# Altium PCB nRF54L15_qfaa_4L_config1.PcbDoc
Units mm, origin at the board's own origin, x right, y up, seen from the top; angles counter-clockwise.
Board outline 15 x 13 mm, 4 copper layers (Top Layer, Mid-Layer 1, Mid-Layer 2, Bottom Layer), stack 1.54 mm thick; 22 components, 46 nets, 93 pads, 72 vias.
Unrouted connection lines stored in the file: 1.
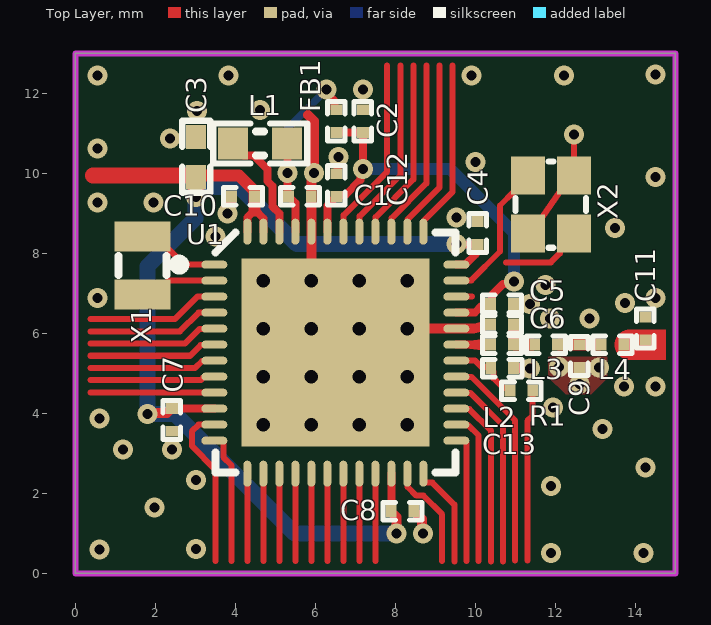
[diagram p0: Top Layer view]
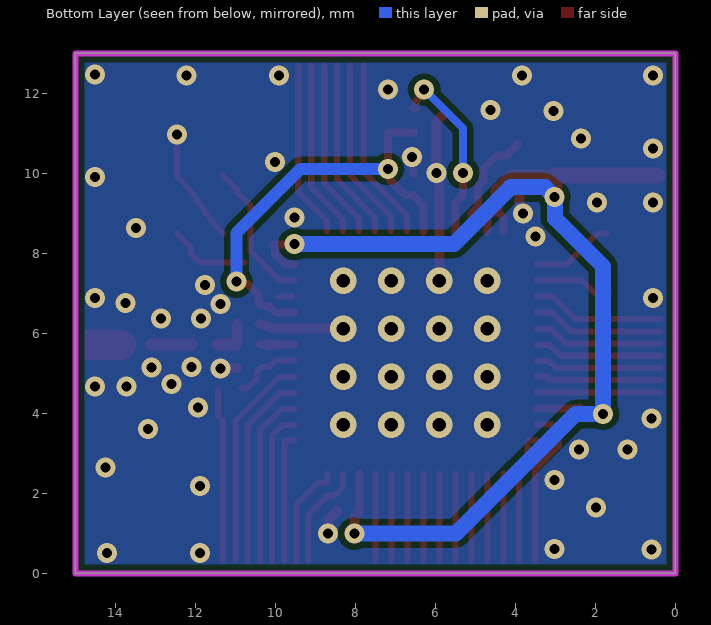
[diagram p1: Bottom Layer view, seen from below]
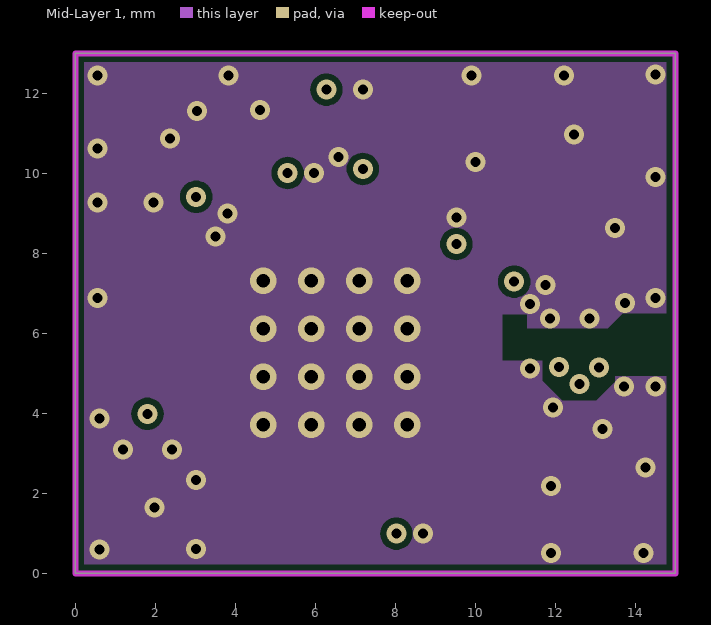
[diagram p2: Mid-Layer 1]
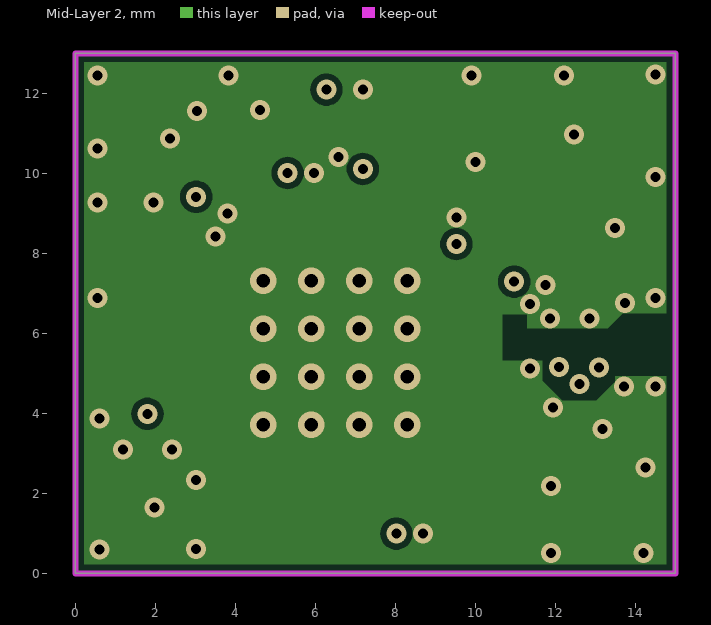
[diagram p3: Mid-Layer 2]
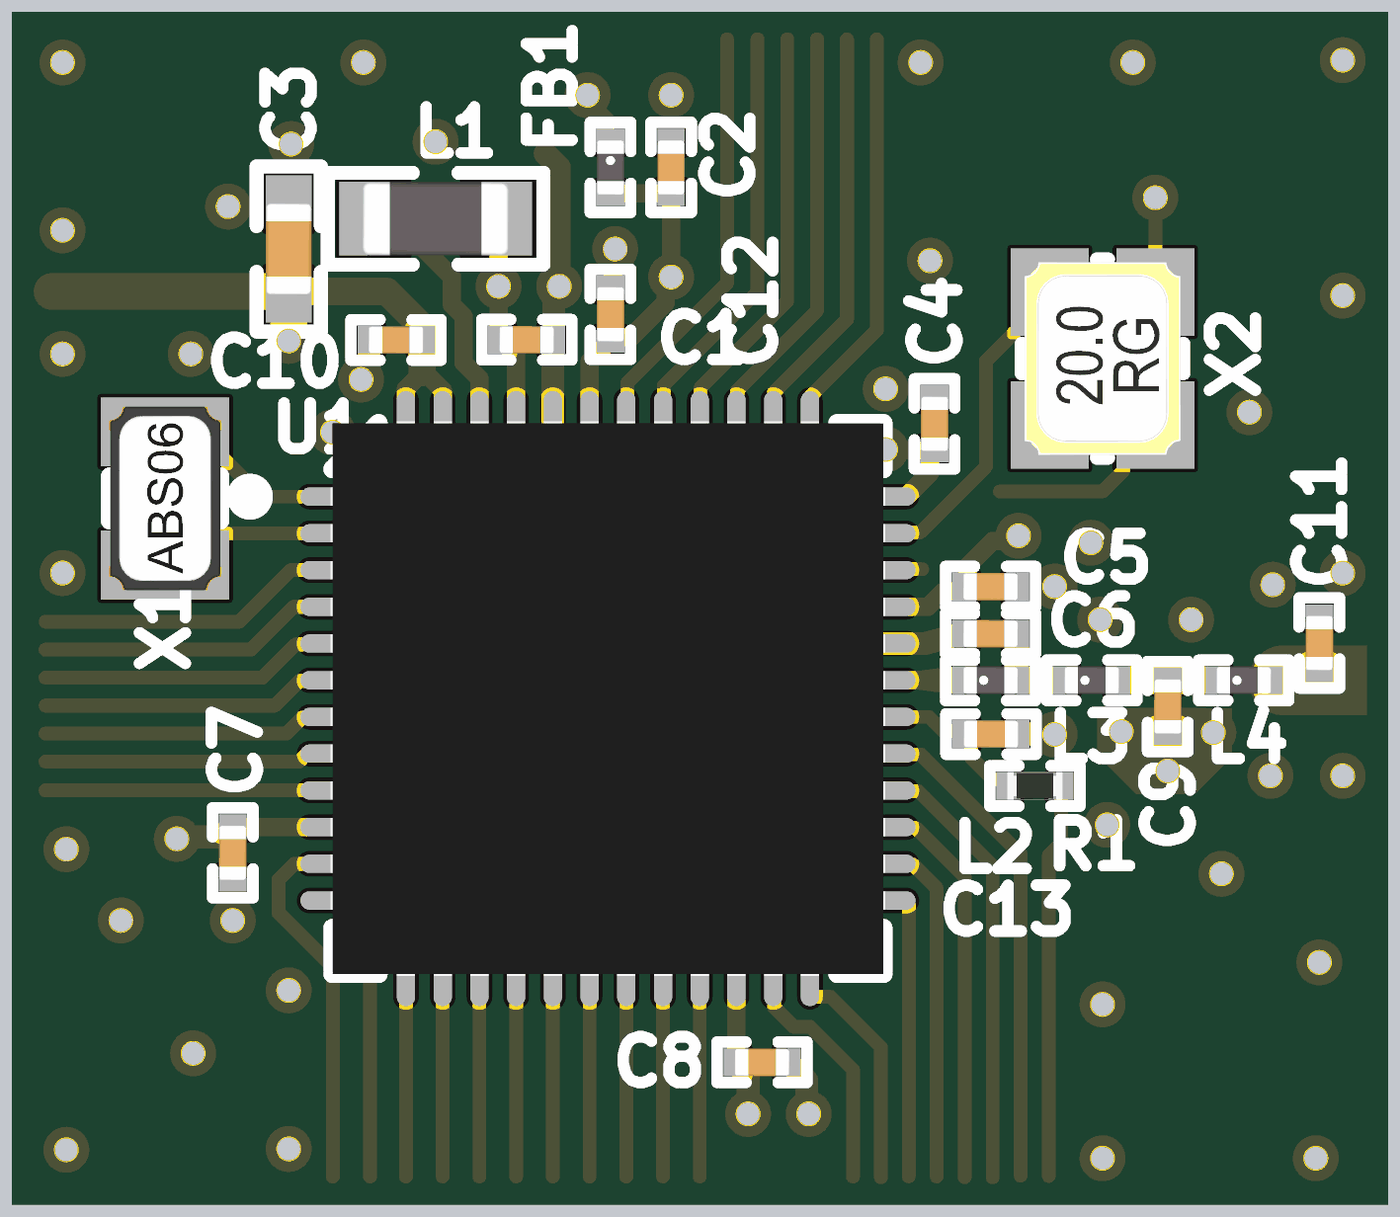
[diagram p4: 3D render of the assembled board from above, using the file's embedded part models]

## Layer stack, top to bottom
Top Solder: solder mask 0.0102, Solder Resist, Dk 3.5
Top Layer: signal copper 0.035
Dielectric 1: prepreg 0.1, PP-018, Dk 4.3
Mid-Layer 1: signal copper 0.035
Dielectric 2: core 1.2, Core-042, Dk 4.6
Mid-Layer 2: signal copper 0.035
Dielectric 3: prepreg 0.1, PP-018, Dk 4.3
Bottom Layer: signal copper 0.035
Bottom Solder: solder mask 0.0102, Solder Resist, Dk 3.5

## Board outline
0,0 0,13 15,13 15,0

## Design rules (kind name [scope] priority, off if disabled: settings)
Clearance Polygon_ANT [(InNamedPolygon('Top_Layer-GND')) or IsFill or IsRegion vs InNet('RF')] p1: gap=0.127 ignorepadtopadclearanceinfootprint=FALSE
Clearance Polygon [(InNamedPolygon('Top_Layer-GND'))  or (InNamedPolygon('Bottom_Layer-GND'))] p2: gap=0.15 ignorepadtopadclearanceinfootprint=FALSE
Clearance [All] p3: gap=0.15 ignorepadtopadclearanceinfootprint=FALSE
ComponentClearance [All] p1 off: gap=0.254 collisioncheckmode=3 verticalgap=0.254 showdistances=FALSE
FabricationTestPointUsage TestPointUsage [All] p1: valid=0 allowmultiple=FALSE
FabricationTestpoint Testpoint [All] p1: side=3 testpointundercomponent=TRUE minsize=1.016 maxsize=2.54 preferedsize=1.524 minholesize=0 maxholesize=1.016 preferedholesize=0.813 testpointgrid=0.025 allowsidetop=TRUE allowsidebottom=TRUE usegrid=TRUE gridtolerance=0
Height [All] p1 off: minheight=0 maxheight=25.4 prefheight=12.7
HoleSize [All] p1: absolutevalues=TRUE maxlimit=4.064 minlimit=0.2 maxpercent=80.000 minpercent=20.000
HoleToHoleClearance [All] p1: gap=0.36 allowstackedmicrovias=TRUE
MinimumAnnularRing [All] p1 off: minimumring=0.152
MinimumSolderMaskSliver [All] p1: minsoldermaskwidth=0.11
PlaneClearance [All] p1: clearance=0.2
PolygonConnect PolygonConnect_SMD_PADs [InComponent('C1','C2','C4','C5','C7','C8','C9','C10','C11') vs InNet('GND')] p1: connectstyle=Direct reliefconductorwidth=0.254 reliefentries=4 polygonreliefangle="90 Angle" airgapwidth=0.254
PolygonConnect PolygonConnect_GND_VIAs [isVia and innet(gnd)] p2: connectstyle=Direct reliefconductorwidth=0.254 reliefentries=4 polygonreliefangle="90 Angle" airgapwidth=0.254
PolygonConnect [All] p3: thpad.connectstyle=Relief thpad.reliefconductorwidth=0.25 thpad.reliefentries=4 thpad.polygonreliefangle="90 Angle" thpad.airgapwidth=0.2 smdpad.connectstyle=Relief smdpad.reliefconductorwidth=0.25 smdpad.reliefentries=4 smdpad.polygonreliefangle="90 Angle" smdpad.airgapwidth=0.2 via.connectstyle=Direct via.reliefconductorwidth=0.254 via.reliefentries=4 via.polygonreliefangle="90 Angle" via.airgapwidth=0.254
RoutingVias [All] p1: holewidth=0.406 width=0.813 viastyle="Through Hole" minholewidth=0.2 minwidth=0.4 maxholewidth=0.711 maxwidth=1.27
SilkToSolderMaskClearance SilkscreenOverComponentPads [IsPad] p1: minsilkscreentomaskgap=0.254 clearancetoexposedcopper=TRUE
SolderMaskExpansion SolderMaskExpansion_via [IsVia] p1: expansion=0.102 istentingtop=TRUE
SolderMaskExpansion [All] p2: expansion=0.04 istentingtop=FALSE
SupplyNets "Schematic Supply Nets_2" [InNet('GND')] p1: voltage=0.000
SupplyNets "Schematic Supply Nets" [InNet('VDD_nRF')] p2: voltage=0.000
Width [All] p1: maxlimit=2.54 minlimit=0.15 preferedwidth=0.15
21 further rules are at their usual default settings.

## Components (designator, comment, footprint, x,y, rotation, side; value= is the part's Value field where it differs from the comment)
C1 "2.2µF" CAPC0603X03L_C 5.615,9.425 r180 top
C2 "2.2µF" CAPC0603X03L_C 7.188,11.303 r270 top
C3 "10µF" CAPC1005X04L 3.023,10.414 r270 top
C4 "100nF" CAPC0603X03L_C 10.058,8.509 r90 top
C5 "2.2nF" CAPC0603X03L_C 10.668,6.735 r180 top
C6 "1.5pF" CAPC0603X03L_C 10.668,6.223 r0 top
C7 "100nF" CAPC0603X03L_C 2.413,3.835 r270 top
C8 "100nF" CAPC0603X03L_C 8.179,1.554 r0 top
C9 "2.0pF" CAPC0603X03L_C 12.598,5.43 r90 top
C10 "100nF" CAPC0603X03L_C 4.191,9.423 r180 top
C11 "0.3pF" CAPC0603X03L_C 14.249,6.121 r270 top
C12 "10nF" CAPC0603X03L_C 6.528,9.703 r270 top
C13 "3.9pF" CAPC0603X03L_C 10.673,5.13 r180 top
FB1 "120R/0.2A" INDC0603X03L_C 6.528,11.303 r270 top
L1 "4.7µH" INDC1608X06L 4.623,10.744 r0 top
L2 "2.7nH" INDC0603X03L_C 10.668,5.715 r0 top
L3 "3.5nH" INDC0603X03L_C 11.77,5.715 r0 top
L4 "3.5nH" INDC0603X03L_C 13.426,5.715 r0 top
R1 "1k" RESC0603X03L_C 11.151,4.564 r0 top
U1 "nRF54L15-QFAA" QFN40P600X600X90-48N 6.5,5.516 r0 top locked
X1 "32.768kHz" XTAL_2012 1.676,7.696 r90 top
X2 "32MHz" BT-XTAL_2016 11.887,9.22 r90 top

## Footprints (in the part's own frame and the unit in brackets; to place one, negate y for a bottom-side part, rotate by r counter-clockwise, add the part's x,y. Pads: shape width x height; smd on the part's side, far side on the other; paste and mask are expansions set on the pad)
BT-XTAL_2016 [mm] "Crystal 2.0 x 1.6 mm"
  rect 0.95x0.85 smd: 1(-0.725,-0.575) 2(0.725,-0.575) 3(0.725,0.575) 4(-0.725,0.575)
  silkscreen extent -1.08,-0.88 1.08,0.88, body extent -1.05,-0.85 1.05,0.85, height 0.56
CAPC0603X03L_C [mm] "Chip Capacitor, 2-Leads, Body 0.6x0.3mm, IPC High Density"
  rect 0.27x0.3 smd mask+0.05: 1(-0.285,0) 2(0.285,0)
  silkscreen extent -0.49,-0.22 0.49,0.22, body extent -0.3,-0.15 0.3,0.15, height 0.3
CAPC1005X04L [mm] "Chip Capacitor, 2-Leads, Body 1.0x0.5mm, IPC High Density"
  rect 0.6x0.5 smd: 1(-0.5,0) 2(0.5,0)
  silkscreen extent -0.9,-0.35 0.9,0.35, body extent -0.5,-0.25 0.5,0.25, height 0.5
INDC0603X03L_C [mm] "Chip Inductor, 2-Leads, Body 0.6x0.3mm, IPC High Density"
  rect 0.27x0.3 smd: 1(-0.285,0) 2(0.285,0)
  silkscreen extent -0.49,-0.22 0.49,0.22, body extent -0.3,-0.15 0.3,0.15, height 0.3
INDC1608X06L [mm] "Chip Inductor, 2-Leads, Body 1.6x0.8mm, IPC High Density"
  rect 0.75x0.8 smd: 1(-0.675,0) 2(0.675,0)
  silkscreen extent -1.17,-0.5 1.17,0.5, body extent -0.8,-0.4 0.8,0.4, height 0.8
QFN40P600X600X90-48N [mm] "QFN, 48-Leads, Body 6,0x6,0mm (max), Pitch 0,40mm, IPC Medium Density"
  oval 0.65x0.2 smd: 1(-3.025,2.2) 2(-3.025,1.8) 3(-3.025,1.4) 4(-3.025,1) 5(-3.025,0.6) 6(-3.025,0.2) 7(-3.025,-0.2) 8(-3.025,-0.6) 9(-3.025,-1) 10(-3.025,-1.4) 11(-3.025,-1.8) 12(-3.025,-2.2) 25(3.025,-2.2) 26(3.025,-1.8) 27(3.025,-1.4) 28(3.025,-1) 29(3.025,-0.6) 30(3.025,-0.2) 31(3.025,0.2) 32(3.025,0.6) 33(3.025,1) 34(3.025,1.4) 35(3.025,1.8) 36(3.025,2.2)
  oval 0.2x0.65 smd: 13(-2.2,-3.025) 14(-1.8,-3.025) 15(-1.4,-3.025) 16(-1,-3.025) 17(-0.6,-3.025) 18(-0.2,-3.025) 19(0.2,-3.025) 20(0.6,-3.025) 21(1,-3.025) 22(1.4,-3.025) 23(1.8,-3.025) 24(2.2,-3.025) 37(2.2,3.025) 38(1.8,3.025) 39(1.4,3.025) 40(1,3.025) 41(0.6,3.025) 42(0.2,3.025) 43(-0.2,3.025) 44(-0.6,3.025) 45(-1,3.025) 46(-1.4,3.025) 47(-1.8,3.025) 48(-2.2,3.025)
  rect 4.7x4.7 smd: 49(0,0)
  silkscreen extent -4.02,-3 3,3, body extent -3.02,-3.02 3.02,3.02, height 0.86
RESC0603X03L_C [mm] "Chip Resistor, 2-Leads, Body 0.6x0.3mm, IPC High Density"
  rect 0.27x0.3 smd: 1(-0.285,0) 2(0.285,0)
  silkscreen extent -0.49,-0.22 0.49,0.22, body extent -0.3,-0.15 0.3,0.15, height 0.23
XTAL_2012 [mm] "XTAL SMD 2.0 x 1.2 mm"
  rect 0.75x1.4 smd: 1(-0.725,0) 2(0.725,0)
  silkscreen extent -0.24,-0.6 0.24,0.6, body extent -1,-0.61 1,0.61, height 0.6

## Part data
C1 C2: library part C0201-2µ2-2.5V-X6T-GRM033D80E225ME47D, "Capacitor, Ceramic, 2.2µF 2.5V X6T 0201,±20%", Manufacturer=Murata, Manufacturer Part Number=GRM033R61A225KE47, Part number IPS=N.A., Part number NEMS=100200527, Supplier Part Number 1=81-GRM033D80E225ME7D, Artikkelnr Noca=N.A., Author=stl1, Component Class=Capacitors, Component Status=Active, ComponentLink1Description=Datasheet, ComponentLink1URL=https://www.murata.com/products/productdetail?partno=GRM033D80E225ME47%23, ComponentLink2Description="Supplier link", ComponentLink2URL=N.A., Footprint Doc=0201, HelpURL=N.A., LatestRevisionDate=2022-02-27, Note="2.5V, 20%, X6T", Pad Count=2, Part Number=C0201-2µ2-2.5V-X6T-GRM033D80E225ME47D, Part number Norautron=N.A., PartId=100200527, Published=2022-02-27, Supplier 1=Mouser, Supplier 2=Digi-Key, Supplier Part Number 2=490-18653-1-ND
C3: library part C0402-10µF-6.3V-X6S, "Capacitor, X6S, ±20%, 6.3V", Manufacturer=N.A., Part number NEMS=100200478, Artikkelnr Noca=N.A., Author=getr, Component Class=Capacitors, Component Status=Active, ComponentLink1Description=Datasheet, ComponentLink1URL=N.A., ComponentLink2Description="Supplier link", ComponentLink2URL=N.A., Footprint Doc=0402, HelpURL=N.A., LatestRevisionDate=2021-06-25, Manufacturer Part Number=N.A., Note=6.3V, Pad Count=2, Part Number=C0402-10µF-6.3V-X6S, Part number IPS=N.A., Part number Norautron=N.A., PartId=100200478, Published=2021-06-25, Supplier 1=N.A., Supplier 2=N.A., Supplier Part Number 1=N.A., Supplier Part Number 2=N.A.
C4 C7 C8 C10: library part C0201-100n-10V-X7R, "Capacitor, X7R, ±10%", Manufacturer=N.A., Part number NEMS=100200469, Artikkelnr Noca=N.A., Author=getr, Component Class=Capacitors, Component Status=Active, ComponentLink1Description=Datasheet, ComponentLink1URL=N.A., ComponentLink2Description="Supplier link", ComponentLink2URL=N.A., Footprint Doc=0201, HelpURL=N.A., LatestRevisionDate=2021-04-12, Manufacturer Part Number=N.A., Note=10V, Pad Count=2, Part Number=C0201-100n-10V-X7R, Part number IPS=N.A., Part number Norautron=N.A., PartId=100200469, Published=2021-04-12, Supplier 1=N.A., Supplier 2=N.A., Supplier Part Number 1=N.A., Supplier Part Number 2=N.A.
C5: library part C0201-2n2, "Capacitor, X7R, ±10%, 10V", Manufacturer=N.A., Part number IPS=00000001778, Part number NEMS=100200060, Part number Norautron=26470002, Artikkelnr Noca=N.A., Author=rsk, Component Class=Capacitors, Component Status=Active, ComponentLink1Description=Datasheet, ComponentLink1URL=N.A., ComponentLink2Description="Supplier link", ComponentLink2URL=N.A., Footprint Doc=0201, HelpURL=N.A., LatestRevisionDate=2014-11-13, Manufacturer Part Number=N.A., Note=10V, Pad Count=2, Part Number=C0201-2n2, PartId=100200060, Published=2014-11-13, Supplier 1=N.A., Supplier 2=N.A., Supplier Part Number 1=N.A., Supplier Part Number 2=N.A.
C6: library part C0201-1.5p-25V-NP0-GJM0335C1E1R5WB01, "Capacitor, NP0, ±0.05pF, 25V, High Q", Manufacturer=Murata, Manufacturer Part Number=GJM0335C1E1R5WB01, Part number IPS=N.A., Part number NEMS=100200477, Supplier Part Number 1=490-11176-2-ND, Artikkelnr Noca=N.A., Author=masi, Component Class=Capacitors, Component Status=Active, ComponentLink1Description=Datasheet, ComponentLink1URL=https://search.murata.co.jp/Ceramy/image/img/A01X/G101/ENG/GJM0335C1E1R5WB01-01.pdf, ComponentLink2Description="Supplier link", ComponentLink2URL=N.A., Footprint Doc=0201, HelpURL=https://www.murata.com/products/productdetail?partno=GJM0335C1E1R5WB01%23, LatestRevisionDate=2021-06-15, Note=25V, Pad Count=2, Part Number=C0201-1.5p-25V-NP0-GJM0335C1E1R5WB01, Part number Norautron=N.A., PartId=100200477, Published=2021-06-15, Supplier 1=Digi-Key, Supplier 2=Mouser, Supplier Part Number 2=81-GJM0335C1E1R5WB1D
C9: library part C0201-2.0p-HQ-Murata, "Capacitor, NP0, ±0.05pF, 25V", Manufacturer=Murata, Manufacturer Part Number=GJM0335C1E2R0WB01, Part number IPS=00000001775, Part number NEMS=100200419, Part number Norautron=N.A., Artikkelnr Noca=N.A., Author=rsk, Component Class=Capacitors, Component Status=Active, ComponentLink1Description=Datasheet, ComponentLink1URL=N.A., ComponentLink2Description="Supplier link", ComponentLink2URL=N.A., Footprint Doc=0201, HelpURL=https://psearch.en.murata.com/capacitor/product/GJM0335C1E2R0WB01%23.html, LatestRevisionDate=2018-10-25, Note=25V, Pad Count=2, Part Number=C0201-2.0p-HQ-Murata, PartId=100200419, Published=2018-10-25, Supplier 1=N.A., Supplier 2=N.A., Supplier Part Number 1=N.A., Supplier Part Number 2=N.A.
C11: library part C0201-0.3p-50V-GRM0335C1HR30BA01, "Capacitor, C0G, ±0.1pF, 50V", Manufacturer=Murata, Manufacturer Part Number=GRM0335C1HR30BA01, Part number IPS=N.A., Part number NEMS=100200650, Supplier Part Number 1=490-6135-2-ND, Artikkelnr Noca=N.A., Author=masi, Component Class=Capacitors, Component Status=Active, ComponentLink1Description=Datasheet, ComponentLink1URL=https://www.murata.com/en-global/products/productdetail?partno=GRM0335C1HR30BA01%23, ComponentLink2Description="Supplier link", ComponentLink2URL=N.A., Footprint Doc=0201, HelpURL=N.A., LatestRevisionDate=2024-01-10, Note=50V, Pad Count=2, Part Number=C0201-0.3p-50V-GRM0335C1HR30BA01, Part number Norautron=N.A., PartId=100200650, Published=2024-01-10, Supplier 1=Digi-Key, Supplier 2=Mouser, Supplier Part Number 2=81-GRM0335C1HR30BA1D
C12: library part C0201-10n-6.3V-X7R, "Capacitor, X7R, 6.3V", Manufacturer=Murata, Manufacturer Part Number=GRM033R70J103KA01D, Part number IPS=N.A., Part number NEMS=100200407, Supplier Part Number 1=490-1262-1-ND, Artikkelnr Noca=N.A., Author=rsk, Component Class=Capacitors, Component Status=Active, ComponentLink1Description=Datasheet, ComponentLink1URL=http://search.murata.co.jp/Ceramy/image/img/A01X/G101/ENG/GRM033R70J103KA01-01.pdf, ComponentLink2Description="Supplier link", ComponentLink2URL=N.A., Footprint Doc=0201, HelpURL=N.A., LatestRevisionDate=2020-10-13, Note=6.3V, Pad Count=2, Part Number=C0201-10n-6.3V-X7R, Part number Norautron=N.A., PartId=100200407, Published=2018-05-07, Supplier 1=Digi-Key, Supplier 2=N.A., Supplier Part Number 2=N.A.
C13: library part C0201-3.9p, "Chip Cap 0201", Manufacturer=N.A., Part number NEMS=100200024, Artikkelnr Noca=N.A., Author=rsk, Component Class=Capacitors, Component Status=Active, ComponentLink1Description=Datasheet, ComponentLink1URL=N.A., ComponentLink2Description="Supplier link", ComponentLink2URL=N.A., Footprint Doc=0201, HelpURL=N.A., LatestRevisionDate=2014-11-13, Manufacturer Part Number=N.A., Note="Chip Cap 1%", Pad Count=2, Part Number=C0201-3.9p, Part number IPS=N.A., Part number Norautron=N.A., PartId=100200024, Published=2014-11-13, Supplier 1=N.A., Supplier 2=N.A., Supplier Part Number 1=N.A., Supplier Part Number 2=N.A.
FB1: library part FB0201-120R@100M-200mA-BLM03AG121SN1D, "Ferrite Bead, 120 Ohm @ 100MHz, 200mA, 500 mOhm Max", Manufacturer=Murata, Manufacturer Part Number=BLM03AG121SN1D, Part number IPS=N.A., Part number NEMS=100300419, Supplier Part Number 1=490-5622-1-ND, Artikkelnr Noca=N.A., Author=stl1, Component Class=Inductors, Component Status=Active, ComponentLink1Description=Datasheet, ComponentLink1URL=https://www.murata.com/en-eu/products/productdetail?partno=BLM03AG121SN1%23, ComponentLink2Description="Supplier link", ComponentLink2URL=N.A., Footprint Doc=0201, HelpURL=N.A., LatestRevisionDate=2022-02-27, Note="Ferrite Bead", Pad Count=2, Part Number=FB0201-120R@100M-200mA-BLM03AG121SN1D, Part number Norautron=N.A., PartId=100300419, Published=2022-02-27, Supplier 1=Digi-Key, Supplier 2=Mouser, Supplier Part Number 2=81-BLM03AX121SN1D
L1: library part L0603-4µ7-MLZ1608M4R7WT000, "Inductor, 120mA, ±20%, 0.65R", Manufacturer="TDK Corporation", Manufacturer Part Number=MLZ1608M4R7WT000, Part number IPS=N.A., Part number NEMS=100300440, Supplier Part Number 1=445-6390-2-ND, Artikkelnr Noca=N.A., Author=stl1, Component Class=Inductors, Component Status=Active, ComponentLink1Description=Datasheet, ComponentLink1URL=https://product.tdk.com/en/search/inductor/inductor/smd/info?part_no=MLZ1608M4R7WT000, ComponentLink2Description="Supplier link", ComponentLink2URL=N.A., Footprint Doc=0603, HelpURL=N.A., LatestRevisionDate=2023-05-10, Note="Power Inductor ±20%", Pad Count=2, Part Number=L0603-4µ7-MLZ1608M4R7WT000, Part number Norautron=N.A., PartId=100300440, Published=2023-05-10, Supplier 1=Digi-Key, Supplier 2=Mouser, Supplier Part Number 2=810-MLZ1608M4R7WT000
L2: library part L0201-2n7-HQ-Murata, "Inductor, 600mA, ±0.1ｎH, 120mOhm", Manufacturer=Murata, Manufacturer Part Number=LQP03HQ2N7B02, Part number IPS=00000001753, Part number NEMS=100300214, Part number Norautron=N.A., Supplier Part Number 1=490-13909-1-ND, Artikkelnr Noca=N.A., Author=rsk, Component Class=Inductors, Component Status=Active, ComponentLink1Description=Datasheet, ComponentLink1URL=https://search.murata.co.jp/Ceramy/image/img/P02/JELF243C-0021.pdf, ComponentLink2Description="Supplier link", ComponentLink2URL=N.A., Footprint Doc=0201, HelpURL=https://psearch.en.murata.com/inductor/product/LQP03HQ2N7B02%23.html, LatestRevisionDate=2018-10-23, Note="-55°C ~ 125°C", Pad Count=2, Part Number=L0201-2n7-HQ-Murata, PartId=100300214, Published=2018-10-23, Supplier 1=Digi-Key, Supplier 2=N.A., Supplier Part Number 2=N.A.
L3 L4: library part L0201-3n5-HQ-Murata, "Inductor, 500mA, ±0.1ｎH, 170mOhm", Manufacturer=Murata, Manufacturer Part Number=LQP03HQ3N5B02, Part number IPS=N.A., Part number NEMS=100300222, Supplier Part Number 1=490-13925-1-ND, Artikkelnr Noca=N.A., Author=rsk, Component Class=Inductors, Component Status=Active, ComponentLink1Description=Datasheet, ComponentLink1URL=https://search.murata.co.jp/Ceramy/image/img/P02/JELF243C-0021.pdf, ComponentLink2Description="Supplier link", ComponentLink2URL=N.A., Footprint Doc=0201, HelpURL=https://psearch.en.murata.com/inductor/product/LQP03HQ3N5B02%23.html, LatestRevisionDate=2018-10-23, Note="-55°C ~ 125°C", Pad Count=2, Part Number=L0201-3n5-HQ-Murata, Part number Norautron=N.A., PartId=100300222, Published=2018-10-23, Supplier 1=Digi-Key, Supplier 2=N.A., Supplier Part Number 2=N.A.
R1: library part R0201-1k0, "Resistor, ±1%, 0.05W", Manufacturer=N.A., Part number IPS=00000005786, Part number NEMS=100100043, Artikkelnr Noca=N.A., Author=rsk, Component Class=Resistors, Component Status=Active, ComponentLink1Description=Datasheet, ComponentLink1URL=N.A., ComponentLink2Description="Supplier link", ComponentLink2URL=N.A., Footprint Doc=0201, HelpURL=N.A., LatestRevisionDate=2014-11-13, Manufacturer Part Number=N.A., Note="Chip Res 1%", Pad Count=2, Part Number=R0201-1k0, Part number Norautron=N.A., PartId=100100043, Published=2014-11-13, Supplier 1=N.A., Supplier 2=N.A., Supplier Part Number 1=N.A., Supplier Part Number 2=N.A.
U1: "Multi-protocol Bluetooth Low Energy, IEEE 802.15.4 and 2.4GHz proprietary Wireless MCU", Manufacturer="Nordic Semiconductor", Part number IPS=N.A., Part number NEMS=102000370, Artikkelnr Noca=N.A., Author=stl1, Component Class=Nordic_Devices, Component Status=Active, ComponentLink1Description=Datasheet, ComponentLink1URL=N.A., ComponentLink2Description="Supplier link", ComponentLink2URL=N.A., Footprint Doc=QFN-48, HelpURL=N.A., LatestRevisionDate=2024-11-27, Manufacturer Part Number=nRF54L15-QFAA, Note=N.A., Pad Count=49, Part Number=nRF54L15-QFAA, Part number Norautron=N.A., PartId=102000370, Published=2024-11-27, Supplier 1="Nordic Semiconductor", Supplier 2=N.A., Supplier Part Number 1=nRF54L15-QFAA, Supplier Part Number 2=N.A.
X1: library part XTAL_SMD2012_32.768kHz_9pF_TXC, "XTAL SMD 2012, 32.768kHz, 9pF, ±20ppm", Manufacturer="TXC Corporation", Manufacturer Part Number=9HT11-32.768KDZC-T, Part number IPS=N.A., Part number NEMS=101600107, Supplier Part Number 1=887-1426-2-ND, Artikkelnr Noca=N.A., Author=eisk, Component Class=Oscillators, Component Status=Active, ComponentLink1Description=Datasheet, ComponentLink1URL=http://www.txccrystal.com/images/pdf/9ht11.pdf, ComponentLink2Description="Supplier link", ComponentLink2URL=https://www.digikey.com/en/products/detail/9HT11-32.768KDZC-T/887-1426-1-ND/2403277, Footprint Doc=XTAL_2012, HelpURL=http://www.txccrystal.com/images/pdf/9ht11.pdf, LatestRevisionDate=2023-03-14, Note="XTAL SMD 32.768kHz", Pad Count=2, Part Number=XTAL_SMD2012_32.768kHz_9pF_TXC, Part number Norautron=N.A., PartId=101600107, Published=2014-03-28, Supplier 1=Digi-Key, Supplier 2=Mouser, Supplier Part Number 2=717-9HT11-32.7KDZC-T
X2: library part XTAL_SMD2016_32MHz_8pF_Kyocera, "XTAL SMD 2016, 32MHz, Cl=8pF, Tot: ±40ppm", Manufacturer=Kyocera, Manufacturer Part Number=CX2016DB32000D0WZRC1, Part number IPS=00000007827, Part number NEMS=101600039, Part number Norautron=26511136, Supplier Part Number 1=1253-1586-1-ND, Artikkelnr Noca=22010022, Author=rsk, Component Class=Oscillators, Component Status=Active, ComponentLink1Description=Datasheet, ComponentLink1URL=N.A., ComponentLink2Description="Supplier link", ComponentLink2URL=N.A., Footprint Doc=XTAL_2016, HelpURL=http://media.digikey.com/pdf/Data%20Sheets/AVX%20PDFs/CX2016DB32000D0WZRC1_Spec.pdf, LatestRevisionDate=2016-06-02, Note="XTAL SMD 32.000MHz", Pad Count=4, Part Number=XTAL_SMD2016_32MHz_8pF_Kyocera, PartId=101600039, Published=2015-10-15, Supplier 1=Digi-Key, Supplier 2=N.A., Supplier Part Number 2=N.A.

## Via types
v1: diameter 0.5, hole 0.25, Top Layer to Bottom Layer, tented both sides, 56 vias
v2: diameter 0.66, hole 0.33, Top Layer to Bottom Layer, tented both sides, 16 vias

## Nets (pads, with @x,y where several pads share a name; then routed paths per layer and width w, separated by ;. In a path a pad name is that pad's centre, name@x,y a point inside that pad or via, vN(x,y) a via of type N, cw(c..) or ccw(c..) an arc to the next point about the centre after c; other vN are vias at no path point)
DCC: L1.1 U1.46 | length 2.8
  Top Layer w0.2: L1.1 3.948,10.719 4.223,10.444 4.466,10.444 4.801,10.109 4.801,9.804 4.928,9.677 4.928,9.172 5.1,9 U1.46
DECA: C2.2 C5.2 C12.2 FB1.2 U1.33 U1.43 | length 11.2
  Top Layer w0.2: U1.43 6.3,9.19 C12.2 6.563,9.453 6.75,9.453 7.131,9.833 7.131,10.052 v1(7.188,10.109) C2.2 ; FB1.2 C2.2@7.188,11.018 ; U1.33 9.988,6.516 10.157,6.685 10.348,6.685 10.383,6.72 C5.2 ; C5.2@10.383,6.731 10.418,6.766 10.418,6.961 10.689,7.232 10.915,7.232 v1(10.973,7.29)
  Bottom Layer w0.3: v1(7.188,10.109) 9.373,10.109 10.973,8.509 v1(10.973,7.29)
DECD: C1.2 FB1.1 L1.2 U1.45 | length 5.4
  Top Layer w0.2: L1.2@5.309,10.784 5.309,9.446 C1.2 5.33,9.41 5.365,9.375 5.38,9.375 5.5,9.255 5.5,8.766 U1.45 ; v1(6.278,12.09) 6.278,12.009 6.478,11.809 6.478,11.623 FB1.1@6.544,11.623
  Bottom Layer w0.2: v1(5.309,10.008) 5.309,11.125 6.274,12.09 v1(6.278,12.09)
GND: C1.1 C2.1 C3.1 C4.2 C5.1 C6.1 C7.2 C8.2 C9.1 C10.2 C11.1 C12.1 C13.1 U1.32 U1.44 U1.49 X2.2 X2.4 | length 11.2
  Top Layer w0.15: X2.4 11.662,8.895 12.112,9.545 X2.2 ; X2.2@12.462,9.92 v1(12.462,10.973)
  Top Layer w0.2: C12.1 6.553,10.013 6.553,10.389 v1(6.579,10.414)
  Top Layer w0.25: v1(3.81,8.992) 3.81,9.059 3.896,9.145 3.896,9.413 C10.2 ; 5.817,11.455 5.969,11.303 5.969,9.94 5.91,9.881 5.91,9.435 C1.1 U1.44 v2(5.9,7.316) ; U1.49@8.303,6.116 U1.32 9.954,6.116 C6.1@10.381,6.23 ; C8.2 8.464,1.539 8.474,1.529 8.489,1.529 8.665,1.353 8.665,1.013 v1(8.687,0.991) ; C13.1 v1@11.361,5.13
  other v1: 11.887,0.508 14.211,0.508 0.6,0.6 3.023,0.61 1.981,1.651 11.887,2.184 3.023,2.337 14.249,2.642 1.194,3.099 2.413,3.099 13.183,3.607 0.6,3.875 11.938,4.14 13.716,4.674 14.503,4.674 12.598,4.727 11.366,5.125 13.094,5.145 12.091,5.156 11.862,6.375 12.852,6.375 11.366,6.736 13.741,6.756 0.559,6.883 14.503,6.883 11.76,7.214 3.5,8.418 13.487,8.636 9.525,8.89 0.559,9.271 1.956,9.271 14.503,9.906 5.969,10.008 10.008,10.287 0.559,10.617 2.362,10.877 3.048,11.557 4.623,11.582 7.188,12.09 0.559,12.446 3.835,12.446 9.906,12.446 12.217,12.446 14.503,12.471
  other v2: 4.7,3.716 5.9,3.716 7.1,3.716 8.3,3.716 4.7,4.916 5.9,4.916 7.1,4.916 8.3,4.916 4.7,6.116 5.9,6.116 7.1,6.116 8.3,6.116 4.7,7.316 7.1,7.316 8.3,7.316
NetC6_2: C6.2 L2.2 L3.1 | length 0.9
  Top Layer w0.27: L2.2@10.953,5.73 C6.2
  Top Layer w0.3: L2.2@10.98,5.715 L3.1@11.43,5.715
NetC9_2: C9.2 L3.2 L4.1 | length 1
  Top Layer w0.3: L3.2@12.091,5.715 C9.2 L4.1@13.106,5.715
NetC13_2: C13.2 R1.1 U1.30 | length 1.7
  Top Layer w0.15: U1.30 9.997,5.316 10.152,5.161 10.335,5.161 C13.2@10.385,5.111 ; C13.2@10.384,5.103 10.4,5.103 10.456,5.047 10.456,4.976 10.457,4.974 10.457,4.873 10.696,4.634 R1.1@10.836,4.634
NetL2_1: L2.1 U1.31 | length 0.9
  Top Layer w0.2: U1.31 L2.1@10.382,5.716
NRESET: R1.2 | length 4.3
  Top Layer w0.15: 11.303,0.315 11.303,3.81 11.436,3.943 R1.2
P0.00: U1.23 | length 2.6
  Top Layer w0.15: U1.23@8.309,2.482 8.309,2.157 8.527,1.939 8.703,1.939 9.169,1.473 9.169,0.308
P0.01: U1.24 | length 2.6
  Top Layer w0.15: U1.24 8.7,2.289 8.723,2.266 8.925,2.266 9.474,1.717 9.474,0.301
P0.02: U1.27 | length 4.3
  Top Layer w0.15: U1.27@9.535,4.106 9.853,4.106 10.386,3.573 10.386,0.301
P0.03: U1.28 | length 4.9
  Top Layer w0.15: U1.28 9.535,4.506 9.881,4.506 10.691,3.696 10.691,0.301
P0.04: U1.29 | length 5.4
  Top Layer w0.15: U1.29@9.534,4.907 9.909,4.907 10.996,3.82 10.996,0.318
P1.00/XL1: U1.1 X1.2 | length 2.1
  Top Layer w0.15: X1.2@1.702,8.497 1.951,8.497 2.301,8.147 2.301,8.138 2.723,7.716 U1.1
P1.01/XL2: U1.2 X1.1 | length 1.9
  Top Layer w0.15: X1.1@1.676,6.997 2.001,6.997 2.321,7.316 U1.2
P1.02/NFC1: U1.3 | length 3.3
  Top Layer w0.15: 0.375,6.354 2.487,6.354 3.049,6.916 U1.3
P1.03/NFC2: U1.4 | length 3.3
  Top Layer w0.152: 0.375,6.049 2.614,6.049 3.08,6.516 U1.4
P1.04/AIN0: U1.5 | length 3.2
  Top Layer w0.152: 0.375,5.745 2.741,5.745 3.103,6.107 U1.5@3.466,6.107
P1.05/AIN1: U1.6 | length 3.2
  Top Layer w0.152: 0.375,5.44 2.868,5.44 3.135,5.707 U1.6@3.466,5.707
P1.06/AIN2: U1.7 | length 3.2
  Top Layer w0.152: 0.375,5.135 2.995,5.135 3.167,5.307 U1.7@3.466,5.307
P1.07/AIN3: U1.8 | length 3.1
  Top Layer w0.152: 0.375,4.83 3.137,4.83 3.199,4.892 3.213,4.892 3.237,4.916 U1.8
P1.08: U1.9 | length 3.1
  Top Layer w0.152: 0.375,4.516 U1.9
P1.09: U1.37 | length 4.4
  Top Layer w0.152: U1.37@8.709,8.55 8.709,8.811 9.428,9.529 9.428,12.698
P1.10: U1.38 | length 4.5
  Top Layer w0.152: U1.38@8.309,8.55 8.309,8.85 9.103,9.643 9.103,12.698
P1.11: U1.39 | length 4.5
  Top Layer w0.152: U1.39@7.909,8.55 7.909,8.877 8.778,9.746 8.778,12.698
P1.12: U1.40 | length 4.5
  Top Layer w0.15: U1.40@7.51,8.551 7.51,8.904 8.453,9.847 8.453,12.699
P1.13: U1.41 | length 4.6
  Top Layer w0.15: U1.41@7.11,8.551 7.11,8.928 8.128,9.946 8.128,12.699
P1.14: U1.42 | length 4.6
  Top Layer w0.15: U1.42@6.71,8.551 6.71,8.952 7.798,10.041 7.798,12.699
P2.00: U1.11 | length 4.1
  Top Layer w0.152: U1.11 3.081,3.716 2.912,3.547 2.912,3.184 3.503,2.593 3.503,0.309
P2.01: U1.12 | length 3.3
  Top Layer w0.15: U1.12 3.677,3.316 3.7,3.293 3.7,2.906 3.909,2.697 3.909,0.309
P2.02: U1.13 | length 2.2
  Top Layer w0.15: 4.3,0.309 U1.13
P2.03: U1.14 | length 2.2
  Top Layer w0.15: 4.7,0.309 U1.14
P2.04: U1.15 | length 2.2
  Top Layer w0.15: 5.1,0.309 U1.15
P2.05: U1.16 | length 2.2
  Top Layer w0.15: 5.5,0.309 U1.16
P2.06: U1.17 | length 2.2
  Top Layer w0.15: 5.9,0.309 U1.17
P2.07: U1.18 | length 2.2
  Top Layer w0.15: 6.3,0.309 U1.18
P2.08: U1.19 | length 2.2
  Top Layer w0.15: 6.7,0.309 U1.19
P2.09: U1.20 | length 2.2
  Top Layer w0.15: 7.1,0.309 U1.20
P2.10: U1.21 | length 2.2
  Top Layer w0.15: 7.5,0.309 U1.21
RF: C11.2 L4.2 | length 0.5
  Top Layer w0.762: 13.86,5.715 C11.2@14.367,5.715
SWDCLK: U1.26 | length 3.8
  Top Layer w0.15: U1.26@9.535,3.706 9.822,3.706 10.081,3.447 10.081,0.309
SWDIO: U1.25 | length 3.2
  Top Layer w0.15: U1.25 9.736,3.316 9.777,3.276 9.777,0.311
VDD_NRF: C3.2 C4.1 C7.1 C8.1 C10.1 U1.10 U1.22 U1.36 U1.47 U1.48 | length 31.6
  Top Layer w0.2: C7.1@2.398,4.12 C7.1 ; C7.1@2.417,4.116 U1.10 ; U1.48 4.3,8.892 4.476,9.068 4.491,9.084 4.7,8.875 U1.47 ; C8.1 7.929,1.519 C8.1@7.929,1.504 ; C8.1@7.9,1.554 U1.22 ; U1.36 9.75,7.716 9.75,7.718 10.008,7.976 C4.1@10.008,8.164 ; v1(9.525,8.23) 9.534,8.221 10.021,8.221 C4.1@10.043,8.199
  Top Layer w0.25: v1(1.803,3.988) 1.825,4.01 2.287,4.01 C7.1@2.398,4.12 ; C8.1@7.929,1.504 8.026,1.406 v1(8.026,0.991)
  Top Layer w0.3: C3.2@2.973,9.951 3.023,9.951 4.09,9.951 4.476,9.566 C10.1 4.476,9.068
  Top Layer w0.4: 0.445,9.951 C3.2@2.946,9.951 ; v1(3.023,9.413) C3.2@3.023,9.951
  Bottom Layer w0.4: v1(1.803,3.988) 2.489,3.988 5.486,0.991 v1(8.026,0.991) ; v1@1.803,4.034 1.803,7.671 3.003,8.871 v1@3.003,9.394 ; v1@3.05,9.413 v1(3.023,9.413) 3.261,9.652 4.115,9.652 5.537,8.23 v1(9.525,8.23)
XC1: U1.34 X2.1 | length 2.4
  Top Layer w0.15: U1.34@9.586,6.926 9.923,6.926 ; 10.77,7.772 11.887,7.772 12.112,7.997 12.112,8.145 X2.1
XC2: U1.35 X2.3 | length 3.6
  Top Layer w0.15: U1.35 9.535,7.326 9.899,7.326 10.617,8.044 10.617,9.195 10.962,9.54 10.962,9.595 X2.3

## Polygon pours and split planes (outlines as drawn)
GND on Top Layer "Top_Layer-GND" (none, remove dead copper, pour order 1004): 0,13 0,0 15,0 15,13
GND on Top Layer "GND_island" (solid, pour order 1000): 11.776,5.414 11.776,4.905 12.207,4.473 12.893,4.473 13.299,4.878 13.299,5.413
GND on Bottom Layer "Bottom_Layer-GND" (solid, remove dead copper, pour order 1001): 0,13 0,0 15,0 15,13
GND on Mid-Layer 1 "Top_Layer-GND" (solid, remove dead copper, pour order 1002): 0,13 0,0 15,0 15,13
GND on Mid-Layer 2 "Top_Layer-GND" (solid, remove dead copper, pour order 1003): 0,13 0,0 15,0 15,13

## Keep-outs
Keep-Out Layer:
  the board outline again, w0.152

## Other copper
Top Layer:
  rectangle net RF: 14.3,5.334 14.765,6.096
  pour cut-out: 11.826,5.413 11.826,4.905 12.258,4.473 12.944,4.473 13.35,4.879 13.35,4.88 13.35,5.413 13.5,5.413 13.5,4.793 13.018,4.31 12.179,4.31 11.671,4.818 11.671,5.413
  pour cut-out: 10.705,6.786 10.705,6.577 10.818,6.577 10.818,6.786
  region net NetL2_1: 10.248,5.865 9.859,5.815 9.859,5.616 10.248,5.565
  pour cut-out: 6.985,9.601 6.172,9.601 6.172,10.947 6.985,10.947
  pour cut-out: 0.833,7.904 0.833,7.493 0.945,7.493 0.945,7.904
  pour cut-out: 4.753,11.278 4.543,11.278 4.543,11.165 4.753,11.165
  pour cut-out: 13.206,10.718 13.206,7.463 10.338,7.463 10.338,10.718
Mid-Layer 1:
  pour cut-out: 11.671,5.309 11.671,4.818 12.179,4.31 13.018,4.31 13.5,4.793 13.5,5.309
  pour cut-out: 10.668,6.477 10.668,5.309 13.005,5.309 13.386,4.928 15,4.928 15,6.502 13.691,6.502 13.31,6.121 11.303,6.121 11.303,6.477
Mid-Layer 2:
  pour cut-out: 11.671,5.309 11.671,4.818 12.179,4.31 13.018,4.31 13.5,4.793 13.5,5.309
  pour cut-out: 10.668,6.477 10.668,5.309 13.005,5.309 13.386,4.928 15,4.928 15,6.502 13.691,6.502 13.31,6.121 11.303,6.121 11.303,6.477

## Silkscreen, mask and mechanical layers (free items; w line width, h text height)
Mechanical 1:
  the board outline again, w0.152

## Dimensions
15,13 to 15,0 on Mechanical 3
0,0 to 15,0 on Mechanical 3